# Altium PCB PCCB.pcbdoc
Units mm, origin at the board's own origin, x right, y up, seen from the top; angles counter-clockwise.
Board outline 116.4 x 83.56 mm, 2 copper layers (Top Layer, Bottom Layer); 95 components, 84 nets, 419 pads, 297 vias.
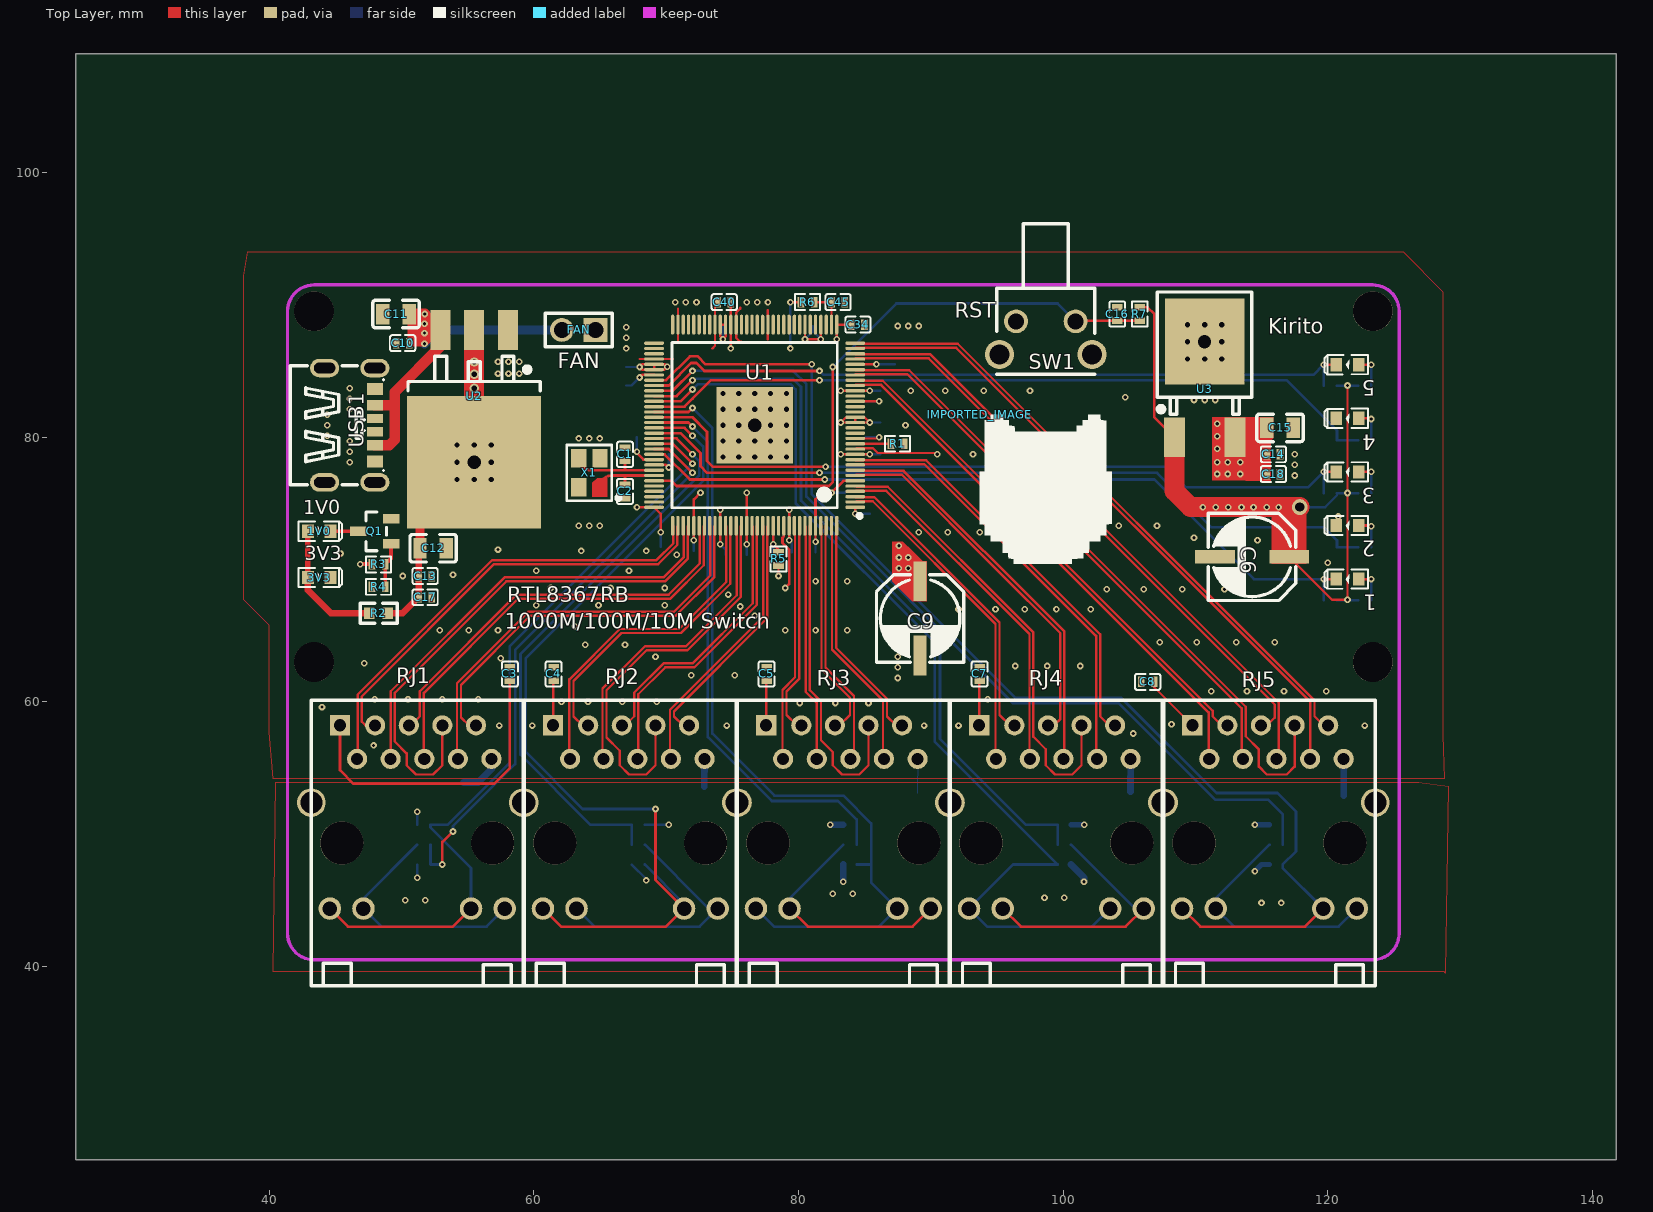
[diagram p0: Top Layer view]
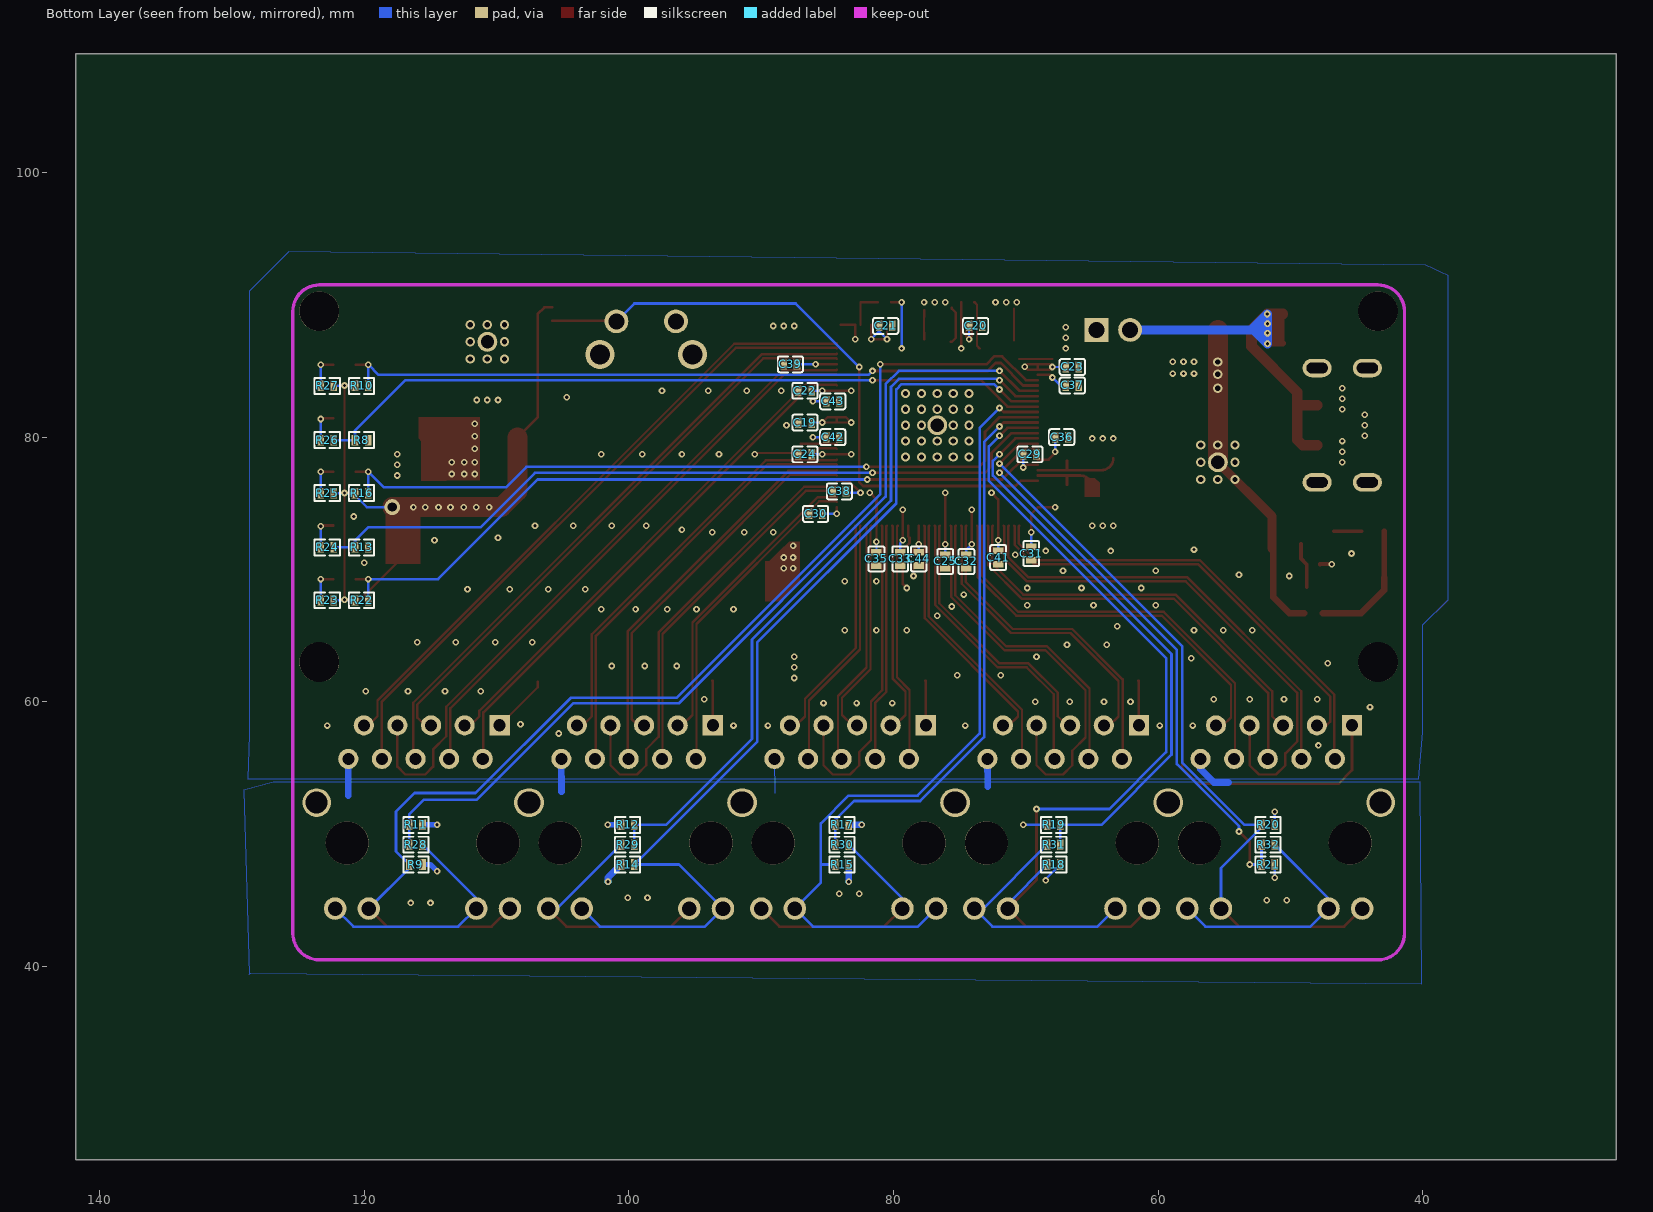
[diagram p1: Bottom Layer view, seen from below]

## Layer stack, top to bottom
Top Layer: signal copper (thickness not stored)
Dielectric: dielectric 0.32, FR-4, Dk 4.8
Bottom Layer: signal copper (thickness not stored)

## Board outline
141.8,25.4 25.4,25.4 25.4,108.963 141.8,108.963

## Components (designator, comment, footprint, x,y, rotation, side; value= is the part's Value field where it differs from the comment)
1 "LED-0603" LED0603_RED 121.5,69.27 r180 top
1V0 "LED-0603_R" LED0603_RED 43.782,72.885 r0 top
2 "LED-0603" LED0603_RED 121.5,73.32 r180 top
3 "LED-0603" LED0603_RED 121.5,77.37 r180 top
3V3 "LED-0603_R" LED0603_RED 43.782,69.385 r0 top
4 "LED-0603" LED0603_RED 121.5,81.42 r180 top
5 "LED-0603" LED0603_RED 121.5,85.47 r180 top
C1 "22PF" C0402#1 66.9,78.7 r90 top
C2 "22PF" C0402#1 66.9,75.9 r90 top
C3 "10nf" C0402#1 58.2,62.1 r270 top
C4 "10nf" C0402#1 61.5,62.1 r270 top
C5 "10nf" C0402#1 77.6,62.1 r270 top
C6 "100uF" CAP-SMD_BD6.3-L6.6-W6.6-FD 114.29,70.95 r180 top
C7 "10nf" C0402#1 93.7,62.1 r270 top
C8 "10nf" C0402#1 106.4,61.5 r0 top
C9 "100uF" CAP-SMD_BD6.3-L6.6-W6.6-FD 89.2,66.3 r270 top
C10 "100nf" C0402#1 50.1,87.1 r180 top
C11 "10uf" C0805 49.6,89.3 r180 top
C12 "10uf" C0805 52.4,71.6 r0 top
C13 "100nf" C0402#1 51.8,69.5 r0 top
C14 "100nf" C0402#1 115.9,78.7 r0 top
C15 "10uf" C0805 116.4,80.7 r0 top
C16 "100nf" C0402#1 104.1,89.3 r90 top
C17 "10nf" C0402#1 51.8,67.9 r0 top
C18 "10nf" C0402#1 115.9,77.2 r0 top
C19 "100nf" C0402#2 86.7,81.1 r180 bottom
C20 "100nf" C0402#2 73.8,88.4 r0 bottom
C21 "100nf" C0402#2 80.6,88.4 r0 bottom
C22 "100nf" C0402#2 86.7,83.5 r180 bottom
C23 "100nf" C0402#2 66.5,85.3 r0 bottom
C24 "100nf" C0402#2 86.7,78.7 r0 bottom
C25 "100nf" C0402#2 76.1,70.6 r270 bottom
C29 "100nf" C0402#2 69.7,78.7 r0 bottom
C30 "100nf" C0402#2 85.9,74.2 r180 bottom
C31 "100nf" C0402#2 69.6,71.2 r90 bottom
C32 "100nf" C0402#2 74.5,70.6 r90 bottom
C33 "100nf" C0402#2 79.5,70.8 r90 bottom
C34 "100nf" C0402#1 84.5,88.5 r0 top
C35 "100nf" C0402#2 81.3,70.8 r270 bottom
C36 "100nf" C0402#2 67.3,80 r180 bottom
C37 "100nf" C0402#2 66.5,83.9 r180 bottom
C38 "100nf" C0402#2 84.1,75.9 r0 bottom
C39 "100nf" C0402#2 87.8,85.5 r0 bottom
C40 "100nf" C0402#1 74.4,90.2 r0 top
C41 "100nf" C0402#2 72.1,70.9 r270 bottom
C42 "100nf" C0402#2 84.6,80 r180 bottom
C43 "100nf" C0402#2 84.6,82.7 r180 bottom
C44 "100nf" C0402#2 78.1,70.8 r90 bottom
C45 "100nf" C0402#1 83,90.2 r0 top
FAN "77311-102-02LF" HDR-TH_2P-P2.54-V 63.4,88.1 r180 top
IMPORTED_IMAGE "IMPORTED_IMAGE" IMPORTED_IMAGE 93.7,81.7 r0 top
Q1 "SI2302" SOT-23(SOT-23-3) 47.982,72.885 r90 top
R1 "2.49K" R0402#1 87.5,79.499 r0 top
R2 "1K" R0603 48.282,66.686 r180 top
R3 "1K" R0402#1 48.282,70.386 r0 top
R4 "10K" R0402#1 48.282,68.686 r0 top
R5 "0R" R0402#1 78.5,70.8 r90 top
R6 "0R" R0402#1 80.7,90.2 r0 top
R7 "4.7K" R0402#1 105.8,89.3 r90 top
R8 "4.7K" R0402#2 120.2,79.77 r0 bottom
R9 "4.7K" R0402#2 116.1,47.7 r0 bottom
R10 "4.7K" R0402#2 120.2,83.87 r180 bottom
R11 "4.7K" R0402#2 116.1,50.7 r0 bottom
R12 "4.7K" R0402#2 100.1,50.7 r180 bottom
R13 "4.7K" R0402#2 120.2,71.67 r0 bottom
R14 "4.7K" R0402#2 100.1,47.7 r180 bottom
R15 "4.7K" R0402#2 83.9,47.7 r0 bottom
R16 "4.7K" R0402#2 120.2,75.77 r180 bottom
R17 "4.7K" R0402#2 83.9,50.7 r0 bottom
R18 "4.7K" R0402#2 67.9,47.7 r0 bottom
R19 "4.7K" R0402#2 67.9,50.7 r180 bottom
R20 "4.7K" R0402#2 51.7,50.7 r0 bottom
R21 "4.7K" R0402#2 51.7,47.7 r0 bottom
R22 "4.7K" R0402#2 120.2,67.67 r180 bottom
R23 "1.5K" R0402#2 122.801,67.67 r180 bottom
R24 "1.5K" R0402#2 122.801,71.67 r0 bottom
R25 "1.5K" R0402#2 122.801,75.77 r180 bottom
R26 "1.5K" R0402#2 122.801,79.77 r0 bottom
R27 "1.5K" R0402#2 122.801,83.87 r180 bottom
R28 "470R" R0402#2 116.1,49.2 r0 bottom
R29 "470R" R0402#2 100.1,49.2 r180 bottom
R30 "470R" R0402#2 83.9,49.2 r0 bottom
R31 "470R" R0402#2 67.9,49.2 r180 bottom
R32 "470R" R0402#2 51.7,49.2 r0 bottom
RJ1 "HR911130A" RJ45-TH_HR911130A 51.2,51.3 r180 top
RJ2 "HR911130A" RJ45-TH_HR911130A 67.3,51.3 r180 top
RJ3 "HR911130A" RJ45-TH_HR911130A 83.4,51.3 r180 top
RJ4 "HR911130A" RJ45-TH_HR911130A 99.5,51.3 r180 top
RJ5 "HR911130A" RJ45-TH_HR911130A 115.6,51.3 r180 top
SW1 "TC-1102N-C-CL-B" SW-TH_TC-1102N-C-CL-B 98.7,87.5 r180 top
U1 "RTL8367RB-VB-CG" LQFP-128_L14.0-W14.0-P0.40-LS16.0-BL-EP5.8 76.7,80.9 r90 top
U2 "SPX1587AT-L-3-3/TR" TO-263-3_L8.6-W10.2-P2.54-LS14.4-TL 55.5,83.1 r270 top
U3 "AP7361-10D-13" TO-252-2_L6.6-W6.1-P4.57-LS9.9-BR-CW 110.7,83.6 r270 top
USB1 "TYPE-C 6P" TYPE-C-SMD_TYPE-C-6P 46.1,80.9 r270 top
X1 "25MHz" OSC-SMD_4P-L3.2-W2.5-BL 64.2,77.3 r90 top

## Footprints (in the part's own frame and the unit in brackets; to place one, negate y for a bottom-side part, rotate by r counter-clockwise, add the part's x,y. Pads: shape width x height; smd on the part's side, far side on the other; paste and mask are expansions set on the pad)
C0402#1 [mm]
  rect 0.5x0.8 smd: 1(-0.5,0) 2(0.5,0)
  silkscreen extent -0.95,-0.6 0.95,0.6
C0402#2 [mm]
  rect 0.5x0.8 smd: 1(0.5,0) 2(-0.5,0)
  silkscreen extent -0.95,-0.6 0.95,0.6
C0805 [mm]
  rect 1x1.55 smd: 1(-1,0) 2(1,0)
  silkscreen extent -1.75,-1.04 1.75,1.04
CAP-SMD_BD6.3-L6.6-W6.6-FD [mm]
  rect 3x1 smd: 1(-2.8,0) 2(2.8,0)
  silkscreen extent -3.3,-3.3 3.3,3.3
HDR-TH_2P-P2.54-V [mm]
  rect 1.8x1.8 hole 1.2: 1(-1.27,0)
  round 1.8 hole 1.2: 2(1.27,0)
  silkscreen extent -2.54,-1.27 2.54,1.27
IMPORTED_IMAGE [mm]
  silkscreen extent 0,-11.29 9.98,0
LED0603_RED [mm]
  rect 0.9x1 smd: 1(-0.85,0) 2(0.85,0)
  silkscreen extent -1.54,-0.73 1.75,0.73
LQFP-128_L14.0-W14.0-P0.40-LS16.0-BL-EP5.8 [mm]
  oval 0.25x1.5 smd: 1(-6.2,-7.6) 2(-5.799,-7.6) 3(-5.4,-7.6) 4(-5.001,-7.6) 5(-4.6,-7.6) 6(-4.201,-7.6) 7(-3.8,-7.6) 8(-3.401,-7.6) 9(-3,-7.6) 10(-2.601,-7.6) 11(-2.2,-7.6) 12(-1.801,-7.6) 13(-1.4,-7.6) 14(-1.001,-7.6) 15(-0.599,-7.6) 16(-0.201,-7.6) 17(0.201,-7.6) 18(0.599,-7.6) 19(1.001,-7.6) 20(1.4,-7.6) 21(1.801,-7.6) 22(2.2,-7.6) 23(2.601,-7.6) 24(3,-7.6) 25(3.401,-7.6) 26(3.8,-7.6) 27(4.201,-7.6) 28(4.6,-7.6) 29(5.001,-7.6) 30(5.4,-7.6) 31(5.799,-7.6) 32(6.2,-7.6) 65(6.2,7.6) 66(5.799,7.6) 67(5.4,7.6) 68(5.001,7.6) 69(4.6,7.6) 70(4.201,7.6) 71(3.8,7.6) 72(3.401,7.6) 73(3,7.6) 74(2.601,7.6) 75(2.2,7.6) 76(1.801,7.6) 77(1.4,7.6) 78(1.001,7.6) 79(0.599,7.6) 80(0.201,7.6) 81(-0.201,7.6) 82(-0.599,7.6) 83(-1.001,7.6) 84(-1.4,7.6) 85(-1.801,7.6) 86(-2.2,7.6) 87(-2.601,7.6) 88(-3,7.6) 89(-3.401,7.6) 90(-3.8,7.6) 91(-4.201,7.6) 92(-4.6,7.6) 93(-5.001,7.6) 94(-5.4,7.6) 95(-5.799,7.6) 96(-6.2,7.6)
  oval 1.5x0.25 smd: 33(7.6,-6.2) 34(7.6,-5.799) 35(7.6,-5.4) 36(7.6,-5.001) 37(7.6,-4.6) 38(7.6,-4.201) 39(7.6,-3.8) 40(7.6,-3.401) 41(7.6,-3) 42(7.6,-2.601) 43(7.6,-2.2) 44(7.6,-1.801) 45(7.6,-1.4) 46(7.6,-1.001) 47(7.6,-0.599) 48(7.6,-0.201) 49(7.6,0.201) 50(7.6,0.599) 51(7.6,1.001) 52(7.6,1.4) 53(7.6,1.801) 54(7.6,2.2) 55(7.6,2.601) 56(7.6,3) 57(7.6,3.401) 58(7.6,3.8) 59(7.6,4.201) 60(7.6,4.6) 61(7.6,5.001) 62(7.6,5.4) 63(7.6,5.799) 64(7.6,6.2) 97(-7.6,6.2) 98(-7.6,5.799) 99(-7.6,5.4) 100(-7.6,5.001) 101(-7.6,4.6) 102(-7.6,4.201) 103(-7.6,3.8) 104(-7.6,3.401) 105(-7.6,3) 106(-7.6,2.601) 107(-7.6,2.2) 108(-7.6,1.801) 109(-7.6,1.4) 110(-7.6,1.001) 111(-7.6,0.599) 112(-7.6,0.201) 113(-7.6,-0.201) 114(-7.6,-0.599) 115(-7.6,-1.001) 116(-7.6,-1.4) 117(-7.6,-1.801) 118(-7.6,-2.2) 119(-7.6,-2.601) 120(-7.6,-3) 121(-7.6,-3.401) 122(-7.6,-3.8) 123(-7.6,-4.201) 124(-7.6,-4.6) 125(-7.6,-5.001) 126(-7.6,-5.4) 127(-7.6,-5.799) 128(-7.6,-6.2)
  rect 5.8x5.8 smd: 129(0,0)
  silkscreen extent -7,-8.07 6.25,6.25
OSC-SMD_4P-L3.2-W2.5-BL [mm]
  round 0 smd: 1(-1.1,-0.8)
  rect 1.4x1.15 smd: 2(1.1,-0.8) 3(1.1,0.8) 4(-1.1,0.8)
  Top Layer region: -1.8,-0.225 -0.762,-0.225 -0.4,-0.604 -0.4,-1.375 -1.8,-1.375
  silkscreen extent -2.1,-2.35 2.1,1.7
R0402#1 [mm]
  rect 0.5x0.8 smd: 1(-0.5,0) 2(0.5,0)
  silkscreen extent -0.95,-0.6 0.95,0.6
R0402#2 [mm]
  rect 0.5x0.8 smd: 1(0.5,0) 2(-0.5,0)
  silkscreen extent -0.95,-0.6 0.95,0.6
R0603 [mm]
  rect 0.8x0.9 smd: 1(-0.7,0) 2(0.7,0)
  silkscreen extent -1.4,-0.75 1.4,0.76
RJ45-TH_HR911130A [mil]
  round 66.93 hole 43.31: 11(260,272.62) 12(160,272.62) 13(-160,272.62) 14(-260,272.62)
  rect 60x60 hole 35.83: P1(229.63,-272.62)
  round 60 hole 35.83: P2(179.1,-172.38) P3(125.2,-272.38) P4(79.1,-172.38) P5(25.2,-272.38) P6(-20.9,-172.38) P7(-74.8,-272.38) P8(-120.9,-172.38) P9(-174.8,-272.38) P10(-220.9,-172.38)
  round 85 hole 65: SHIELD0(-315,-42.48) SHIELD1(315,-42.48)
  round 127.95 hole 127.95 unplated: ""(-224.4,77.62) ""(224.4,77.62)
  silkscreen extent -315,-347 315,503
SOT-23(SOT-23-3) [mm]
  rect 0.7x1.25 smd: 1(-0.95,-1.25) 2(0.95,-1.25) 3(0,1.25)
  silkscreen extent -1.46,-0.9 1.46,0.65
SW-TH_TC-1102N-C-CL-B [mm]
  round 1.8 hole 1.2: 1(-2.25,-1.25) 2(2.25,-1.25)
  round 2.2 hole 1.5: 3(3.5,1.25) 4(-3.5,1.25)
  silkscreen extent -3.7,-8.64 3.7,2.75
TO-252-2_L6.6-W6.1-P4.57-LS9.9-BR-CW [mm]
  rect 3x1.6 smd: 1(3.617,-2.285)
  rect 6.5x5.999 smd: 2(-3.617,0)
  rect 3.002x1.6 smd: 3(3.611,2.285)
  silkscreen extent -7.37,-3.57 1.88,3.57
TO-263-3_L8.6-W10.2-P2.54-LS14.4-TL [mil]
  rect 118.5x59.5 smd: 1(-197,100) 2(-197,0) 3(-197,-100)
  rect 394.5x398.5 smd: 4(197,0)
  silkscreen extent -118,-197 -16,197
TYPE-C-SMD_TYPE-C-6P [mm]
  oval 1.4x2.2 hole 0.8 slot 1.6 at 90 deg copper offset 0,0: 7(-4.32,-1.9) 7(4.32,-1.9)
  oval 1.4x2.2 hole 0.8 slot 1.6 at 90 deg: 7(-4.32,1.9) 7(4.32,1.9)
  rect 0.7x1.2 smd: A5(-0.5,1.9) B5(0.5,1.9)
  rect 0.8x1.2 smd: A9(1.52,1.9) B9(-1.52,1.9)
  rect 0.9x1.2 smd: A12(2.75,1.9) B12(-2.75,1.9)
  silkscreen extent -4.5,-4.5 4.5,2.55

## Free pads (board coordinates)
  round 1.5 hole 1: 1(55.5,78.1) 1(76.7,80.9) 1(110.7,87.2)
  round 1.2 hole 0.7: 1(117.89,74.71)
  round 3 hole 3 unplated: ""(43.4,63) ""(43.4,89.5) ""(123.4,63) ""(123.4,89.5)

## Via types
v1: diameter 0.5, hole 0.25, Top Layer to Bottom Layer, 254 vias
v2: diameter 0.7, hole 0.4, Top Layer to Bottom Layer, 43 vias

## Nets (pads, with @x,y where several pads share a name; then routed paths per layer and width w, separated by ;. In a path a pad name is that pad's centre, name@x,y a point inside that pad or via, vN(x,y) a via of type N, cw(c..) or ccw(c..) an arc to the next point about the centre after c; other vN are vias at no path point)
1_1: 1.1 R23.2 | length 2.6
  Top Layer w0.2: 1.1 v1(123.3,69.27)
  Bottom Layer w0.2: R23.2@123.3,67.67 v1(123.3,69.27)
1V0_2: 1V0.2 Q1.3 | length 2.1
  Top Layer w0.3: 1V0.2 Q1.3
2_1: 2.1 R24.1 | length 2.6
  Top Layer w0.2: 2.1 123.25,73.32 v1(123.3,73.27)
  Bottom Layer w0.2: R24.1@123.3,71.67 v1(123.3,73.27)
3_1: 3.1 R25.2 | length 2.5
  Top Layer w0.2: 3.1 v1(123.3,77.37)
  Bottom Layer w0.2: R25.2@123.3,75.77 v1(123.3,77.37)
4_1: 4.1 R26.1 | length 2.6
  Top Layer w0.2: 4.1 123.25,81.42 v1(123.3,81.37)
  Bottom Layer w0.2: R26.1@123.3,79.77 v1(123.3,81.37)
5_1: 5.1 R27.2 | length 2.5
  Top Layer w0.2: 5.1 v1(123.3,85.47)
  Bottom Layer w0.2: R27.2@123.3,83.87 v1(123.3,85.47)
AVDDH: C6.1 C12.1 C13.1 C17.1 C19.1 C20.1 C21.1 C22.1 C23.1 C24.2 C29.1 C30.1 C31.1 C32.1 C33.1 C34.1 pad.1@55.5,78.1 pad.1@117.89,74.71 R2.1 R7.2 R9.2 R10.2 R11.2 R12.2 R14.2 R15.2 R16.2 R17.2 R18.2 R19.2 R20.2 R21.2 R22.2 R23.1 R25.1 R27.1 U1.1 U1.11 U1.17 U1.18 U1.23 U1.33 U1.36 U1.39 U1.54 U1.55 U1.69 U1.70 U1.88 U1.96 U1.106 U1.119 U2.2 U2.4 U3.1 | length 358.9
  Top Layer w0.178: v1(67.8,74.7) U1.96 ; U1.88 70,77.9 v1(70.2,77.7) ; v1(74.1,71.9) U1.106 ; U1.106@74.1,73.301 v1(74.1,74.5) ; v1(79.3,72.2) U1.119@79.3,73.301 ; v1(79.3,74.5) U1.119@79.3,73.301 ; U1.119 U1.119@79.3,73.301 ; U1.39 v1(80.5,87.4) v1(81.7,87.4) 81.7,88.498 U1.36 ; v1(82.9,87.4) 82.9,88.497 U1.33 C34.1@84.001,88.501 ; v1(83.2,78.7) U1.11 v1(85.4,78.7) ; v1(83.2,83.5) U1.23 ; U1.17 v1(83.2,81.1) 83.599,81.499 U1.18 ; v1(84.3,74.2) U1.1 ; U1.17 v1(85.4,81.1) 85.001,81.499 U1.18 ; U1.17 U1.18 ; U1.23 v1(85.4,83.5) ; C6.1 120.34,67.7 v1(121.5,67.7) ; v1@121.46,67.7 121.5,67.74 v1(121.5,75.776) v1(121.5,83.9) ; U1.96 69.6,74.2 ; U1.96 69.6,74.2 ; U1.70 68.199,85.101 v1(68,85.3) 68.2,85.5 U1.69 ; U1.70 69.885,85.101 v1(70.089,85.305) 69.895,85.5 U1.69 ; U1.70 U1.69 ; 69.6,74.2 v1(69.6,72.8) 69.6,74.2 ; 74.099,87.601 v1(74.3,87.4) 74.5,87.6 U1.54 U1.55 74.099,87.601
  Top Layer w0.2: R7.2 106.4,89.8 106.9,89.3 106.9,81.498 U3.1
  Top Layer w0.5: R2.1 50.087,66.686 C17.1 C13.1 51.3,71.5 C12.1
  Top Layer w0.7: C12.1 51.4,73.996 U2.4
  Top Layer w1.5: U2.4 v2(55.5,83.701) v2(55.5,84.756) v2(55.5,85.683) U2.2@55.5,88.104 ; U3.1 108.415,75.935 109.64,74.71 v1(110.573,74.71) v1(111.538,74.71) v1(112.49,74.71) pad.1@117.89,74.71
  Mid-Layer 1 w0.4: v1(51.2,46.7) v1(51.2,51.7)
  Mid-Layer 1 w0.43: 70.2,46.4 v1(70.2,50.7)
  Mid-Layer 1 w0.5: v1(51.2,51.7) 55.2,51.7 59.3,55.8 ; pad.1@55.5,78.1 59.3,74.299 59.3,55.8 ; 73.9,46.4 68.7,46.4 59.3,55.8 ; 73.899,46.4 113.7,46.4 v1(114.5,47.2) v1(114.5,50.7) ; v1(82.4,50.7) 83.4,49.7 v1(83.4,46.4) ; v1(101.588,46.4) v1(101.6,50.7)
  Mid-Layer 1 w1.5: pad.1@55.5,78.099 58.901,74.701 69.566,74.704 69.566,87.899 82.802,87.899 83.699,87 83.699,74.711 v1@111.537,74.711 ; 69.567,74.703 83.8,74.706
  Mid-Layer 1 w2: v1@111.39,74.71 v1(112.49,74.71) pad.1@117.89,74.71
  Bottom Layer w0.178: v1(51.2,46.7) R21.2@51.2,47.7 ; R20.2@51.2,50.7 v1(51.2,51.7) ; C23.1 v1(68,85.3) ; R18.2 68.5,46.6 v1(68.5,46.5) ; R19.2 v1(70.2,50.7) ; C31.1 v1(69.6,72.8) ; v1(70.2,77.7) C29.1 ; v1(74.1,71.9) 74.5,71.5 C32.1 ; v1(74.3,87.4) C20.1 ; v1(79.3,72.2) 79.5,72 C33.1 ; v1(80.5,87.4) 81.1,88 ; v1(81.7,87.4) C21.1@81.1,88 ; v1(84.3,74.2) C30.1 ; v1(85.4,78.7) C24.2 ; v1(85.4,81.1) C19.1 ; v1(85.4,83.5) C22.1 ; pad.1@117.89,74.711 119.81,74.711 120.699,75.6 R16.2@120.699,75.77 ; C21.1@81.1,88 C21.1 81.1,88
  Bottom Layer w0.2: R22.2 R23.1 ; R16.2 R25.1 ; R10.2 R27.1
  Bottom Layer w0.4: R12.2 v1(101.6,50.7) ; v1(114.5,47.2) 115,47.7 R9.2 ; v1(114.5,50.7) R11.2
  Bottom Layer w0.5: v1(82.4,50.7) R17.2 ; v1(83.4,46.4) R15.2 ; R14.2 101.588,46.712 v1(101.588,46.4)
  other v1: 114.5,47.2 113.49,74.71 114.39,74.71 115.39,74.71 116.29,74.71
  other v2: 54.2,76.8 55.5,76.8 56.8,76.8 54.2,78.1 56.8,78.1 54.2,79.4 55.5,79.4 56.8,79.4
AVDDL: C9.1 C14.1 C15.1 C18.1 C25.2 C35.2 C36.2 C37.2 C38.2 C39.2 C40.2 C41.2 C42.2 C43.2 R3.1 R5.1 R6.1 U1.6 U1.14 U1.21 U1.28 U1.53 U1.71 U1.87 U1.101 U1.111 U1.124 U3.3 | length 168
  Top Layer w0.178: v1(68,84.5) 68.2,84.7 U1.71 ; v1(72.1,72.2) U1.101 ; U1.53 C40.2 ; v1(76.1,71.9) U1.111 ; v1(78.5,69.5) R5.1 ; v1(79.4,90.2) R6.1 ; v1(81.3,72.1) U1.124 ; U1.14 86.1,79.899 v1(86.1,80) ; U1.21 v1(86.1,82.7) ; U1.28 v1(85.9,85.5)
  Top Layer w0.2: v1(67.8,78.9) 67.801,78.801 68.301,78.3 U1.87@69.101,78.3 ; U1.101@72.1,73.21 72.1,75.293 v1(72.608,75.801) ; v1(74.9,86.7) U1.53 ; U1.111@76.1,73.178 v1@76.1,75.8 ; U1.124 81.3,75.3 v1(81.8,75.8) ; v1(82.5,75.8) 83.399,76.699 U1.6
  Top Layer w0.3: v1(46.9,70.4) 47.768,70.4 R3.1
  Top Layer w0.5: v1(87.6,71.8) v1(87.6,70.9) ; v1(88.3,70.1) v1(87.6,70.1) v1(87.6,70.9) ; v1(88.3,70.9) v1(87.6,70.9) ; C9.1 89.2,69.3 v1(87.6,70.9)
  Mid-Layer 2 w0.178: v1(87.6,70.1) v1(87.6,71.8)
  Mid-Layer 2 w0.3: v1(46.9,70.4) 52.301,75.801 72,75.801
  Mid-Layer 2 w0.4: v1(67.8,78.9) 71.1,78.889 ; v1@67.999,84.5 71.1,84.493 ; v1(78.5,69.5) 78.668,69.668 78.668,75.801
  Mid-Layer 2 w1: v1(72.608,75.801) 84.209,75.801 ; v1(72.608,75.801) 71.1,75.801 71.1,86.499 84.9,86.499 86.3,85.1 86.3,75.801 84.209,75.801 ; 104.1,79.2 v1@111.6,79.2 ; 104.1,79.199 100.699,75.801 84.209,75.801
  Bottom Layer w0.178: C37.2 67.4,83.901 v1@67.999,84.5 ; v1(67.8,78.9) C36.2 ; C41.2 v1(72.1,72.2) ; C25.2 v1(76.1,71.9) ; v1(79.4,86.7) v1(79.4,90.2) ; C35.2 v1(81.3,72.1) ; v1(82.5,75.8) 83.5,75.8 C38.2 ; C42.2 v1(86.1,80) ; C43.2 v1(86.1,82.7) ; v1(85.9,85.5) C39.2
  other v1: 76.1,75.8 111.65,77.21 112.45,77.21 113.39,77.21 111.65,78.11 112.45,78.11 113.39,78.11 111.65,79.13 111.65,80.07 111.65,81.01
GND: 2.2 3V3.2 4.2 C1.2 C2.1 C3.1 C4.1 C5.1 C6.2 C7.1 C8.1 C9.2 C10.2 C11.2 C12.2 C13.2 C14.2 C15.2 C16.2 C17.2 C18.2 C19.2 C20.2 C21.2 C22.2 C23.2 C24.1 C25.1 C29.2 C30.2 C31.2 C32.2 C33.2 C34.2 C35.1 C36.1 C37.1 C38.1 C39.1 C40.1 C41.1 C42.1 C43.1 C44.2 C45.2 FAN.1 pad.1@76.7,80.9 pad.1@110.7,87.2 Q1.2 R1.2 R4.1 R8.2 R13.2 SW1.2 SW1.3 SW1.4 U1.12 U1.46 U1.47 U1.48 U1.49 U1.50 U1.51 U1.52 U1.56 U1.63 U1.64 U1.65 U1.66 U1.67 U1.68 U1.118 U1.129 U2.1 U3.2 USB1.7 USB1.A12 USB1.B12 X1.2 X1.4 | length 25.2
  Top Layer w0.178: 67.999,85.9 U1.68 70.501,85.9 ; 70.9,87.299 U1.63 70.9,89.7 ; 73.5,86.7 73.7,86.9 U1.56 73.7,90 C40.1 ; 75.599,89.799 75.599,89.7 75.299,89.4 U1.52 75.302,87.5 75.599,87.2 75.7,87.2 ; 77.699,87.401 U1.46 77.699,89.601 ; U1.12 84.359,79.159 85.642,79.159 86,78.801 90.399,78.801 v1(90.5,78.7)
  Top Layer w0.2: U1.118@78.901,73.301 78.901,72.501 78.799,72.402 78.799,72.001 79.3,71.501 79.3,68.9 v1(79,68.6)
  other v1: 47.9,56.7 105.3,57.6 57.4,58.2 59.9,58.2 74.6,58.2 89.5,58.2 92.1,58.2 122.8,58.2 108.2,58.3 44,59.6 80.1,59.9 82.8,59.9 85.3,59.9 62.1,60 64.1,60 66.7,60 69.3,60 48,60.2 50.5,60.2 53.1,60.2 55.8,60.2 94.3,60.2 111.2,60.8 113.9,60.8 116.7,60.8 119.9,60.8 87.5,61.8 71.9,62 75.2,62 87.5,62.6 96.4,62.7 98.8,62.7 101.3,62.7 47.2,62.9 57.5,63.3 69.2,63.4 87.5,63.4 63.9,64.3 66.9,64.3 107.3,64.5 110.1,64.5 113.1,64.5 116,64.5 52.9,65.4 55.1,65.4 57.3,65.4 79,65.4 81.3,65.4 83.7,65.4 63.1,65.7 76.7,66.5 92.1,67 94.9,67 97.1,67 99.5,67 102.1,67 75.6,67.2 60.2,67.3 64.9,67.3 69.9,67.3 74.7,68.1 103.3,68.5 106.1,68.5 109,68.5 112.2,68.5 61.3,68.6 65.8,68.6 69.9,68.6 81.3,69.1 83.7,69.1 50.1,69.5 53.9,69.6 60.2,69.9 67.2,69.9 120,70.5 70.8,71.1 45.4,71.2 63.6,71.4 68.5,71.4 57.3,71.5 114.7,72.2 109.9,72.4 89.1,72.8 91.3,72.8 93.7,72.8 96,73 63.4,73.3 64.2,73.3 65,73.3 98.7,73.3 101.3,73.3 104.2,73.3 107.1,73.3 120.8,74 117.5,77.1 117.5,77.9 46.1,78.1 93.2,78.7 96,78.7 99,78.7 102.1,78.7 117.5,78.7 46.1,78.9 46.1,79.7 63.4,79.9 64.2,79.9 65,79.9 44.4,80.1 44.4,80.9 88.1,80.9 44.4,81.7 46.1,82.1 109.9,82.8 110.7,82.8 111.5,82.8 46.1,82.9 104.7,83 88.5,83.5 91.1,83.5 94,83.5 97.5,83.5 46.1,83.7 57.3,84.8 58.1,84.8 58.9,84.8 57.3,85.7 58.1,85.7 58.9,85.7 67,86.7 67,87.5 67,88.3 87.5,88.4 88.3,88.4 89.1,88.4 70.7,90.2 71.5,90.2 72.3,90.2 76.1,90.2 76.9,90.2 77.7,90.2
  other v2: 74.3,78.5 75.5,78.5 76.7,78.5 77.9,78.5 79.1,78.5 74.3,79.7 75.5,79.7 76.7,79.7 77.9,79.7 79.1,79.7 74.3,80.9 75.5,80.9 77.9,80.9 79.1,80.9 74.3,82.1 75.5,82.1 76.7,82.1 77.9,82.1 79.1,82.1 74.3,83.3 75.5,83.3 76.7,83.3 77.9,83.3 79.1,83.3 109.4,85.9 110.7,85.9 112,85.9 109.4,87.2 112,87.2 109.4,88.5 110.7,88.5 112,88.5
P0A_RJ45_N: RJ1.P3 U1.98 | length 33.1
  Top Layer w0.178: RJ1.P3 47.283,58.219 47.001,58.501 47.001,60.401 57.001,70.401 69.409,70.401 70.854,71.843 70.854,73.253 U1.98@70.902,73.301
P0A_RJ45_P: RJ1.P2 U1.97 | length 34.8
  Top Layer w0.178: RJ1.P2 46.695,55.723 46.695,60.526 56.874,70.705 69.283,70.705 70.548,71.97 70.548,73.252 U1.97
P0B_RJ45_N: RJ1.P7 U1.100 | length 41
  Top Layer w0.178: RJ1.P7 53.099,55.199 52.401,54.5 51.1,54.5 50.399,55.199 50.399,56.101 49.505,56.995 49.505,60.673 57.925,69.095 69.927,69.095 71.652,70.82 71.652,73.253 U1.100@71.7,73.301
P0B_RJ45_P: RJ1.P4 U1.99 | length 33.8
  Top Layer w0.178: RJ1.P4 49.201,60.8 57.801,69.4 69.8,69.4 71.347,70.947 71.347,73.253 U1.99@71.301,73.301
P0C_RJ45_N: RJ1.P6 U1.103 | length 33.1
  Top Layer w0.178: RJ1.P6 51.705,55.704 51.705,60.674 58.826,67.795 70.326,67.795 72.852,70.321 72.852,73.252 U1.103
P0C_RJ45_P: RJ1.P5 U1.102 | length 31
  Top Layer w0.178: RJ1.P5 50.719,58.219 51.4,58.9 51.4,60.8 58.7,68.1 70.199,68.1 72.548,70.446 72.548,73.253 U1.102@72.5,73.301
P0D_RJ45_N: RJ1.P9 U1.105 | length 30.3
  Top Layer w0.178: RJ1.P9 55.086,58.219 54.504,58.801 54.504,61.275 59.726,66.494 70.727,66.494 73.653,69.42 73.653,73.253 U1.105@73.701,73.301
P0D_RJ45_P: RJ1.P8 U1.104 | length 32
  Top Layer w0.178: RJ1.P8 54.2,55.749 54.2,61.4 59.6,66.8 70.6,66.8 73.347,69.547 73.347,73.252 U1.104
P0LED0: 1.2 R22.1 U1.86 | length 57.1
  Top Layer w0.2: U1.86 69.9,78.7 71.8,76.8 v1(82,76.8) ; v1(119.7,69.27) 1.2
  Bottom Layer w0.2: v1(82,76.8) 106.899,76.799 114.43,69.27 v1(119.7,69.27) ; R22.1 v1(119.7,69.27)
P0LED1: R21.1 R32.1 U1.85 | length 43.5
  Top Layer w0.2: v1@53.1,47.7 53.1,49.4 v1(53.9,50.2) ; U1.85 70.202,79.098 v1(72,77.3)
  Bottom Layer w0.2: R32.1 R21.1 v1@53.1,47.7 ; v1(53.9,50.2) 53.9,50.6 58.6,55.3 58.6,63.9 v1(72,77.3)
  other v1: 53.1,47.7
P0LED2: R20.1 RJ1.11 RJ1.13 U1.84 | length 59.2
  Top Layer w0.2: RJ1.11 45.972,42.999 53.889,42.999 RJ1.13 ; U1.84@69.101,79.502 70.498,79.502 v1(72,78)
  Bottom Layer w0.2: R20.1 53.5,50.7 58.2,55.4 58.2,64.2 v1(72,78) ; R20.1 52.2,50.5 55.263,47.437 RJ1.13
P1A_RJ45_N: RJ2.P3 U1.108 | length 23.4
  Top Layer w0.178: RJ2.P3 63.681,58.219 63.005,58.895 63.005,61.567 66.635,65.196 71.126,65.196 74.852,68.92 74.852,73.253 U1.108@74.9,73.301
P1A_RJ45_P: RJ2.P2 U1.107 | length 25.2
  Top Layer w0.178: RJ2.P2 62.7,55.729 62.7,61.692 66.508,65.5 71,65.5 74.547,69.047 74.547,73.253 U1.107
P1B_RJ45_N: RJ2.P7 U1.110 | length 30.8
  Top Layer w0.178: RJ2.P7 69.2,55.199 68.499,54.5 67.199,54.5 66.5,55.199 66.5,56.301 65.505,57.294 65.505,60.866 68.535,63.896 71.626,63.896 75.652,67.922 75.652,73.253 U1.110@75.7,73.301
P1B_RJ45_P: RJ2.P4 U1.109 | length 23.7
  Top Layer w0.178: RJ2.P4 65.2,55.769 65.2,60.992 68.408,64.2 71.5,64.2 75.347,68.048 75.347,73.253 U1.109
P1C_RJ45_N: RJ2.P6 U1.113 | length 22.7
  Top Layer w0.178: RJ2.P6 67.905,55.752 67.905,60.566 69.934,62.595 72.126,62.595 76.852,67.321 76.852,73.252 U1.113
P1C_RJ45_P: RJ2.P5 U1.112 | length 20.6
  Top Layer w0.178: RJ2.P5 66.92,58.219 67.6,58.9 67.6,60.693 69.808,62.9 72,62.9 76.549,67.447 76.549,73.253 U1.112@76.5,73.301
P1D_RJ45_N: RJ2.P9 U1.115 | length 18.8
  Top Layer w0.178: RJ2.P9 71.281,58.219 70.605,58.895 70.605,59.273 77.654,66.322 77.654,73.253 U1.115@77.702,73.301
P1D_RJ45_P: RJ2.P8 U1.114 | length 20.6
  Top Layer w0.178: RJ2.P8 70.3,55.749 70.3,59.4 77.348,66.448 77.348,73.252 U1.114
P1LED0: R13.1 R24.2 U1.82 | length 57.7
  Top Layer w0.2: U1.82 71.101,80.299 72,79.4 72.6,78.8 72.6,77.8 73.1,77.3 v1(81.6,77.3)
  Bottom Layer w0.2: v1(81.6,77.3) 107.1,77.299 111.199,73.2 119.701,73.2 120.699,72.199 R13.1@120.699,71.671 ; R13.1@120.7,71.67 R24.2
P1LED1: R19.1 R31.1 U1.83 | length 44
  Top Layer w0.2: U1.83@69.101,79.9 70.8,79.9 v1(72,78.7)
  Bottom Layer w0.2: R31.1 R19.1 ; R19.1 64.301,50.701 59,55.999 59,63.601 72.5,77.101 72.5,78.201 v1(72,78.7)
P1LED2: R18.1 RJ2.11 RJ2.13 U1.81 | length 69.3
  Top Layer w0.2: RJ2.11 62.071,42.999 69.988,42.999 RJ2.13 ; U1.81 71.402,80.698 v1(72,80.1) ; v1(69.2,51.899) 69.2,46.539 RJ2.13
  Bottom Layer w0.2: R18.1 71.364,44.736 RJ2.13 ; v1(69.2,51.899) 63.699,51.899 59.401,56.2 59.401,63.299 72.8,76.7 72.8,79.301 v1@72,80.101
P2A_RJ45_N: RJ3.P3 U1.121 | length 16.2
  Top Layer w0.178: U1.121@80.102,73.301 80.054,73.253 80.054,61.722 79.104,60.774 79.104,58.996 79.881,58.219 RJ3.P3@80.219,58.219
P2A_RJ45_P: RJ3.P2 U1.120 | length 18.1
  Top Layer w0.178: RJ3.P2 78.8,55.729 78.8,60.9 79.748,61.848 79.748,73.252 U1.120
P2B_RJ45_N: RJ3.P7 U1.123 | length 25.1
  Top Layer w0.178: U1.123@80.902,73.301 80.854,73.253 80.854,60.878 81.707,60.025 81.707,57.094 82.599,56.2 82.599,55.199 83.3,54.5 84.6,54.5 85.299,55.199 RJ3.P7@85.299,58.219
P2B_RJ45_P: RJ3.P4 U1.122 | length 18
  Top Layer w0.178: U1.122@80.501,73.301 80.549,73.253 80.549,60.751 81.403,59.898 RJ3.P4@81.39,55.679
P2C_RJ45_N: RJ3.P6 U1.126 | length 18.6
  Top Layer w0.178: U1.126 82.053,73.253 82.053,62.578 84.205,60.426 84.205,55.952 RJ3.P6
P2C_RJ45_P: RJ3.P5 U1.125 | length 16.7
  Top Layer w0.178: U1.125@81.702,73.301 81.748,73.253 81.748,62.451 83.899,60.299 83.899,58.999 83.117,58.219 RJ3.P5@82.759,58.219
P2D_RJ45_N: RJ3.P9 U1.128 | length 17.4
  Top Layer w0.178: U1.128@82.901,73.301 82.853,73.253 82.853,64.079 86.704,60.226 86.704,58.895 87.382,58.219 RJ3.P9@87.839,58.219
P2D_RJ45_P: RJ3.P8 U1.127 | length 19.3
  Top Layer w0.178: U1.127 82.547,73.252 82.547,63.953 86.4,60.1 86.4,55.749 RJ3.P8
P2LED0: 3.2 R16.1 U1.79 | length 57.1
  Top Layer w0.2: U1.79 72,81.501 73.099,80.401 73.099,78.201 73.543,77.758 v1(82.057,77.758) ; v1(119.7,77.37) 3.2
  Bottom Layer w0.2: v1(82.057,77.758) 107.742,77.758 109.3,76.2 118.53,76.2 v1(119.7,77.37) R16.1
P2LED1: R17.1 R30.1 U1.80 | length 42.7
  Top Layer w0.2: U1.80@69.101,81.102 71.698,81.102 v1(72,80.8)
  Bottom Layer w0.2: v1(72,80.8) 73.155,79.644 73.155,57.343 77.999,52.499 83,52.499 84.4,51.099 R30.1
P2LED2: R15.1 RJ3.11 RJ3.13 U1.78 | length 63.2
  Top Layer w0.2: U1.78 71.7,81.899 v1(72,82.2)
  Bottom Layer w0.2: v1(72,82.2) 73.501,80.7 73.501,57.599 78.2,52.9 83.399,52.9 85.5,50.8 85.5,46.339 87.463,44.376 86.089,42.999 78.172,42.999 RJ3.11@76.795,44.376 ; R15.1 85.5,47.7
P3A_RJ45_N: RJ4.P3 U1.3 | length 23.3
  Top Layer w0.178: U1.3@84.301,75.501 84.349,75.45 85.749,75.45 95.2,65.999 95.2,59.001 95.982,58.219 RJ4.P3
P3A_RJ45_P: RJ4.P2 U1.2 | length 24.7
  Top Layer w0.178: U1.2 84.35,75.151 85.626,75.151 94.902,65.875 94.902,55.727 RJ4.P2
P3B_RJ45_N: RJ4.P7 U1.5 | length 34.8
  Top Layer w0.178: U1.5 84.352,76.248 86.752,76.248 97.76,65.239 97.76,57.353 98.7,56.413 98.7,55.199 99.401,54.5 100.699,54.5 101.4,55.199 RJ4.P7
P3B_RJ45_P: RJ4.P4 U1.4 | length 27.1
  Top Layer w0.178: U1.4 84.351,75.95 86.628,75.95 97.463,65.115 97.463,55.706 RJ4.P4
P3C_RJ45_N: RJ4.P6 U1.8 | length 30.6
  Top Layer w0.178: U1.8 84.35,77.448 87.951,77.448 100.1,65.3 100.1,55.747 RJ4.P6 RJ4.P6@100.105,55.752
P3C_RJ45_P: RJ4.P5 U1.7 | length 28.1
  Top Layer w0.178: U1.7 84.35,77.15 85.366,77.15 87.828,77.15 94.976,70.002 99.802,65.177 99.802,58.7 ; RJ4.P5 99.317,58.219 99.8,58.699
P3D_RJ45_N: RJ4.P9 U1.10 | length 31.6
  Top Layer w0.178: U1.10@84.301,78.3 84.349,78.249 89.653,78.249 102.8,65.1 102.8,58.9 103.48,58.219 RJ4.P9
P3D_RJ45_P: RJ4.P8 U1.9 | length 32.9
  Top Layer w0.178: U1.9 84.349,77.95 89.528,77.95 102.5,64.975 102.5,55.75 RJ4.P8
P3LED0: R8.1 R26.2 U1.77 | length 56.3
  Top Layer w0.2: U1.77@69.101,82.301 71.4,82.301 72,82.9 73.399,84.3 v1(81.6,84.3)
  Bottom Layer w0.2: v1(81.6,84.3) 116.9,84.3 120.7,80.5 120.7,79.77 R26.2@122.3,79.77
P3LED1: R12.1 R29.1 U1.75 | length 56
  Top Layer w0.2: U1.75 70.801,83.098 v1(72,84.3)
  Bottom Layer w0.2: v1(72,84.3) 72,84.399 79.599,84.399 80.199,83.799 80.199,75.199 90.699,64.701 90.699,57.2 97.199,50.701 R12.1 R29.1
P3LED2: R14.1 RJ4.11 RJ4.13 U1.76 | length 75.4
  Top Layer w0.2: U1.76@69.101,82.702 71.1,82.702 v1@72,83.601
  Bottom Layer w0.2: v1@72,83.601 72.401,84 79.401,84 79.8,83.601 79.8,75.001 90.3,64.5 90.3,57 R14.1 96.221,47.701 RJ4.11 94.273,42.999 102.19,42.999 RJ4.13
  other v1: 72,83.6
P4A_RJ45_N: RJ5.P3 U1.25 | length 39.2
  Top Layer w0.178: U1.25 84.349,84.251 86.378,84.251 111.306,59.324 111.301,58.9 111.982,58.219 RJ5.P3@112.419,58.219
P4A_RJ45_P: RJ5.P2 U1.24 | length 40.5
  Top Layer w0.178: U1.24 84.348,83.948 86.252,83.948 111.001,59.198 111.001,55.728 RJ5.P2
P4B_RJ45_N: RJ5.P7 U1.27 | length 51.3
  Top Layer w0.178: U1.27@84.301,85.102 84.349,85.054 88.377,85.054 113.805,59.626 113.805,57.396 114.799,56.4 114.799,55.1 115.401,54.5 116.899,54.5 117.499,55.1 RJ5.P7@117.499,58.219
P4B_RJ45_P: RJ5.P4 U1.26 | length 43.5
  Top Layer w0.178: U1.26 84.348,84.748 88.252,84.748 113.5,59.5 113.5,55.769 RJ5.P4
P4C_RJ45_N: RJ5.P6 U1.30 | length 47.2
  Top Layer w0.178: U1.30 84.347,86.253 89.978,86.253 116.305,59.926 116.305,55.852 RJ5.P6
P4C_RJ45_P: RJ5.P5 U1.29 | length 44.8
  Top Layer w0.178: U1.29 84.346,85.948 89.851,85.948 116,59.799 116,58.801 115.418,58.219 RJ5.P5@114.959,58.219
P4D_RJ45_N: RJ5.P9 U1.32 | length 48.4
  Top Layer w0.178: U1.32 84.349,87.05 92.048,87.05 119,60.101 119,58.9 119.68,58.219 RJ5.P9@120.039,58.219
P4D_RJ45_P: RJ5.P8 U1.31 | length 49.8
  Top Layer w0.178: U1.31@84.301,86.7 84.349,86.748 91.921,86.748 118.695,59.974 RJ5.P8
P4LED0: 5.2 R10.1 U1.73 | length 54.5
  Top Layer w0.2: U1.73@69.101,83.901 70.219,83.901 71.898,85.6 72,85.6 72.3,85.6 72.9,85 v1(81.6,85) ; v1(119.7,85.47) 5.2
  Bottom Layer w0.2: v1(81.6,85) 81.9,84.7 118.93,84.7 v1(119.7,85.47) R10.1
P4LED1: R11.1 R28.1 U1.74 | length 69.3
  Top Layer w0.2: U1.74@69.101,83.502 70.501,83.502 v1(72,85)
  Bottom Layer w0.2: v1(72,85) 79.599,85.001 80.6,84 80.6,75.501 96.201,59.9 104.199,59.9 111.499,52.6 115.5,52.6 116.599,51.501 R11.1@116.599,50.701 ; R28.1@116.6,49.2 R11.1@116.6,50.7
P4LED2: R9.1 RJ5.11 RJ5.13 U1.72 | length 90.1
  Top Layer w0.2: U1.72 70.001,84.3 71.799,86.1 71.9,86.1 72.398,86.1 73,85.501 v1@80.999,85.501 ; RJ5.11@108.995,44.376 110.371,42.999 118.289,42.999 RJ5.13@119.663,44.376
  Bottom Layer w0.2: v1(81,85.5) 80.999,85.499 80.999,75.699 96.399,60.299 104.4,60.299 111.601,53.101 116.201,53.101 117.6,51.699 117.6,48.699 R9.1@116.599,47.701 ; R9.1@116.6,47.7 116.6,47.439 RJ5.13
PLL0: C44.1 R5.2 U1.116 | length 2.8
  Top Layer w0.2: U1.116 v1(78.1,71.9) 78.5,71.5 R5.2
  Bottom Layer w0.2: C44.1 v1(78.1,71.9)
PLL1: C45.1 R6.2 U1.34 | length 3
  Top Layer w0.178: R6.2 C45.1 U1.34
R2_2: 1V0.1 3V3.1 R2.2 | length 9.8
  Top Layer w0.4: 3V3.1 42.932,70.187 1V0.1
  Top Layer w0.5: 3V3.1 42.932,68.435 44.68,66.688 R2.2@47.581,66.688
R3_2: Q1.1 R3.2 R4.2 | length 3.4
  Top Layer w0.3: R4.2 R3.2 49.232,70.837 Q1.1
RJ1_14: R32.2 RJ1.12 RJ1.14 | length 18.3
  Bottom Layer w0.2: R32.2@51.2,49.2 47.136,45.136 RJ1.12 48.511,43 56.429,43 RJ1.14
RJ1_P1: C3.2 RJ1.P1 | length 23.7
  Top Layer w0.2: RJ1.P1 45.368,54.833 46.399,53.799 57.001,53.799 58.2,55.001 C3.2
RJ2_14: R31.2 RJ2.12 RJ2.14 | length 19.3
  Bottom Layer w0.2: RJ2.12 64.611,42.999 72.528,42.999 RJ2.14 ; R31.2 73.224,44.375 RJ2.14
RJ2_P1: C4.2 RJ2.P1 | length 3.4
  Top Layer w0.2: RJ2.P1 61.467,61.567 C4.2
RJ3_14: R30.2 RJ3.12 RJ3.14 | length 18.3
  Top Layer w0.2: RJ3.12@79.335,44.376 80.712,42.999 88.629,42.999 RJ3.14@90.003,44.376
  Bottom Layer w0.2: RJ3.12 79.336,45.136 R30.2
RJ3_P1: C5.2 RJ3.P1 | length 3.4
  Top Layer w0.2: RJ3.P1 77.567,61.568 C5.2
RJ4_14: R29.2 RJ4.12 RJ4.14 | length 19.3
  Top Layer w0.2: RJ4.12 96.813,42.999 104.727,42.999 RJ4.14
  Bottom Layer w0.2: R29.2 105.425,44.375 RJ4.14
RJ4_P1: C7.2 RJ4.P1 | length 3.4
  Top Layer w0.2: RJ4.P1 93.668,61.568 C7.2
RJ5_14: R28.2 RJ5.12 RJ5.14 | length 18.3
  Bottom Layer w0.2: RJ5.12@111.535,44.376 112.911,42.999 120.829,42.999 RJ5.14@122.203,44.376 ; RJ5.12 111.536,45.136 R28.2
RJ5_P1: C8.2 RJ5.P1 | length 4.5
  Top Layer w0.178: C8.2 106.9,61.092 RJ5.P1@109.767,58.224
RST: C16.1 R7.1 SW1.1 U1.91 | length 48.3
  Top Layer w0.2: U1.91 70.4,76.7 70.8,76.3 82.3,76.3 82.6,76.6 v1(82.6,85.3) ; SW1.1 101,88.8 C16.1 R7.1
  Bottom Layer w0.2: v1(82.6,85.3) 87.4,90.1 99.6,90.1 SW1.1
SHIELD: RJ1.P10 RJ1.SHIELD0 RJ1.SHIELD1 RJ2.P10 RJ2.SHIELD0 RJ2.SHIELD1 RJ3.P10 RJ3.SHIELD0 RJ3.SHIELD1 RJ4.P10 RJ4.SHIELD0 RJ4.SHIELD1 RJ5.P10 RJ5.SHIELD0 RJ5.SHIELD1 | length 13.2
  Bottom Layer w0.089: 89,53.101 RJ3.P10@89.01,55.679
  Bottom Layer w0.5: 54.7,53.901 55.799,53.901 56.81,54.912 RJ1.P10 ; 72.899,53.601 RJ2.P10 ; 105.101,53.2 RJ4.P10 ; 121.199,52.9 RJ5.P10
  other v1: 115,44.8 116.5,44.8 50.3,45 51.8,45 98.6,45.2 100.1,45.2 82.6,45.5 84.1,45.5
U1_13: R1.1 U1.13 | length 2.7
  Top Layer w0.2: U1.13@84.301,79.502 R1.1
VBUS: C10.1 C11.1 FAN.2 U2.3 USB1.A9 USB1.B9 | length 65.7
  Top Layer w0.3: C10.1 C11.1
  Top Layer w0.5: C10.1 51.71,87.1 v1(51.75,87.06) 52.794,88.105 U2.3@52.96,88.105
  Top Layer w0.8: USB1.A9@47.999,79.38 49.081,79.38 49.5,79.799 49.5,83.4 52.96,86.86 52.96,88.105 51.764,89.3 C11.1 ; USB1.B9@47.999,82.42 49.5,82.407
  Bottom Layer w0.2: v1(51.75,87.86) 51.989,88.1 FAN.2
  Bottom Layer w0.7: v1(51.75,87.06) 52.79,88.1 FAN.2 ; v1(51.75,88.56) 52.21,88.1 FAN.2 ; v1(51.75,87.06) v1@51.763,89.301 ; v1@51.764,89.3 52.964,88.1 FAN.2
  other v1: 51.764,89.3
XTALI: C2.2 U1.90 X1.1 | length 5.3
  Top Layer w0.2: X1.1 cw(c65.9,76.2) 65.9,77.1 U1.90 ; C2.2 ccw(c66.9,76.404) 66.904,76.404 66.904,77.1
XTALO: C1.1 U1.89 X1.3 | length 6.9
  Top Layer w0.2: X1.3 ccw(c64.301,78.4) 64.301,77.499 U1.89 ; 66.899,77.499 C1.1@66.899,78.199
pads on no net: RJ1. RJ2. RJ3. RJ4. RJ5. U1.15 U1.16 U1.19 U1.20 U1.22 U1.35 U1.37 U1.38 U1.40 U1.41 U1.42 U1.43 U1.44 U1.45 U1.57 U1.58 U1.59 U1.60 U1.61 U1.62 U1.92 U1.93 U1.94 U1.95 U1.117 USB1.A5 USB1.B5

## Polygon pours and split planes (outlines as drawn)
GND on Mid-Layer 2 (solid): 39.8,93.4 125.708,94.007 128.708,91.007 128.708,57.507 128.8,54.2 119.7,54.2 100,54.2 83.4,54.2 40.3,54.2 40.008,57.707 40.008,65.807 38.108,67.707 38.108,92.207
GND on Mid-Layer 1 (solid): 39.5,93.7 125.708,94.007 128.708,91.007 128.708,57.507 128.8,54.2 40.3,54.2 40.008,57.707 40.008,65.807 38.108,67.707 38.108,92.207
SHIELD on Top Layer (solid): 40.5,53.9 126.9,53.9 129.1,53.6 128.9,39.5 128.8,39.6 40.3,39.6
GND on Top Layer (solid): 38.4,94 125.7,94 128.7,91 128.7,57.5 128.8,54.2 40.3,54.2 40,57.7 40,65.8 38.1,67.7 38.1,92.2
SHIELD on Bottom Layer (solid): 40.2,53.9 126.9,53.9 129.1,53.3 128.7,39.4 128.6,39.5 40.1,38.7
GND on Bottom Layer (solid): 39.8,93 125.708,94.007 128.708,91.007 128.708,57.507 128.8,54.2 40.3,54.2 40.008,57.707 40.008,65.807 38.108,67.707 38.108,92.207

## Keep-outs
Keep-Out Layer:
  lines w0.254: 41.4,42.499 ccw(c43.4,42.499) 43.4,40.499 ; 41.4,89.5 cw(c43.4,89.5) 43.4,91.5 ; 123.4,40.499 ccw(c123.4,42.499) 125.4,42.499 ; 123.4,91.5 cw(c123.4,89.5) 125.4,89.5

## Other copper
Top Layer:
  rectangle net AVDDH: 115.74,70.41 118.39,75.21
  rectangle net AVDDL: 111.25,76.71 113.79,81.51
  region net AVDDL: 113,81.5 114,81.5 115.9,81.5 115.9,79.9 115.7,79.7 115.7,78.2 115.7,76.7 115.1,76.7 114.9,76.7 113.8,76.7 113.4,77.2
  region net VBUS: 50.6,89.3 50.6,87.1 51.7,87.1 51.955,87.1 52.959,88.104 52.96,88.104 51.764,89.299 51.764,89.3
  region net AVDDL: 87.1,72.1 87.9,72.1 88.6,71.4 88.6,69.8 87.1,69.8
  region net AVDDL: 87.1,69.9 87.1,69.1 88.6,67.6 89.7,67.6 89.7,70.6 89.4,70.6 88.6,71.4
Mid-Layer 1:
  rectangle net AVDDH: 53.5,76 57.5,80.2
Mid-Layer 2:
  rectangle net AVDDL: 111.25,76.71 113.79,81.51
  region net AVDDL: 111.35,76.75 111.35,78.65 110.75,79.05 109.45,79.05
  region net AVDDL: 111.3,81.5 111.3,79.6 110.7,79.2 109.4,79.2
  region net AVDDL: 87.1,69.8 88.6,69.8 88.6,75.801 87.1,75.801

## Silkscreen, mask and mechanical layers (free items; w line width, h text height)
Top Overlay:
  text "RST" at 91.8,88.6 h2
  text "Kirito" at 115.5,87.4 h2
  text "FAN" at 61.8,84.8 h2
  text "1V0" at 42.6,73.8 h1.8
  text "3V3" at 42.7,70.3 h1.8
  text "RTL8367RB" at 58,67.1 h2
  text "1000M/100M/10M Switch" at 57.8,65.1 h2
Bottom Solder:
  rectangle: 108.7,85 112.7,89.2
  region: 73.8,83.8 79.6,83.8 79.6,78 73.8,78
Document:
  lines w0.003: 83.574,67.156 83.625,67.207